# EAGLE board DX HRII2 (EAGLE 7.6.0)
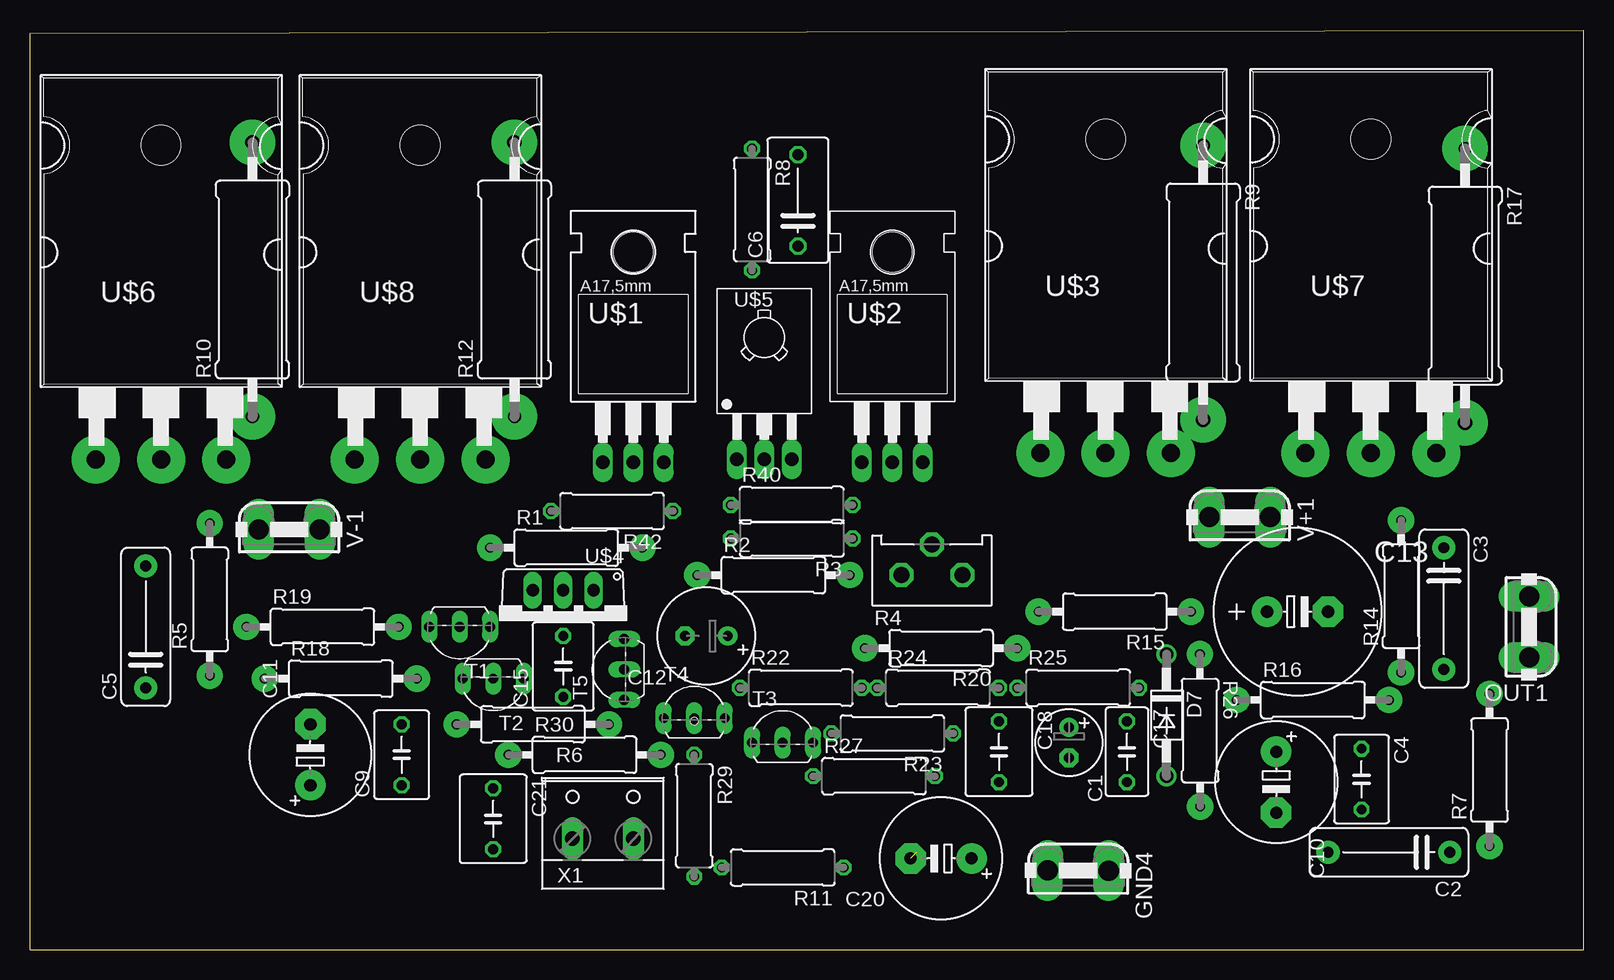
[diagram p0: board, top side]
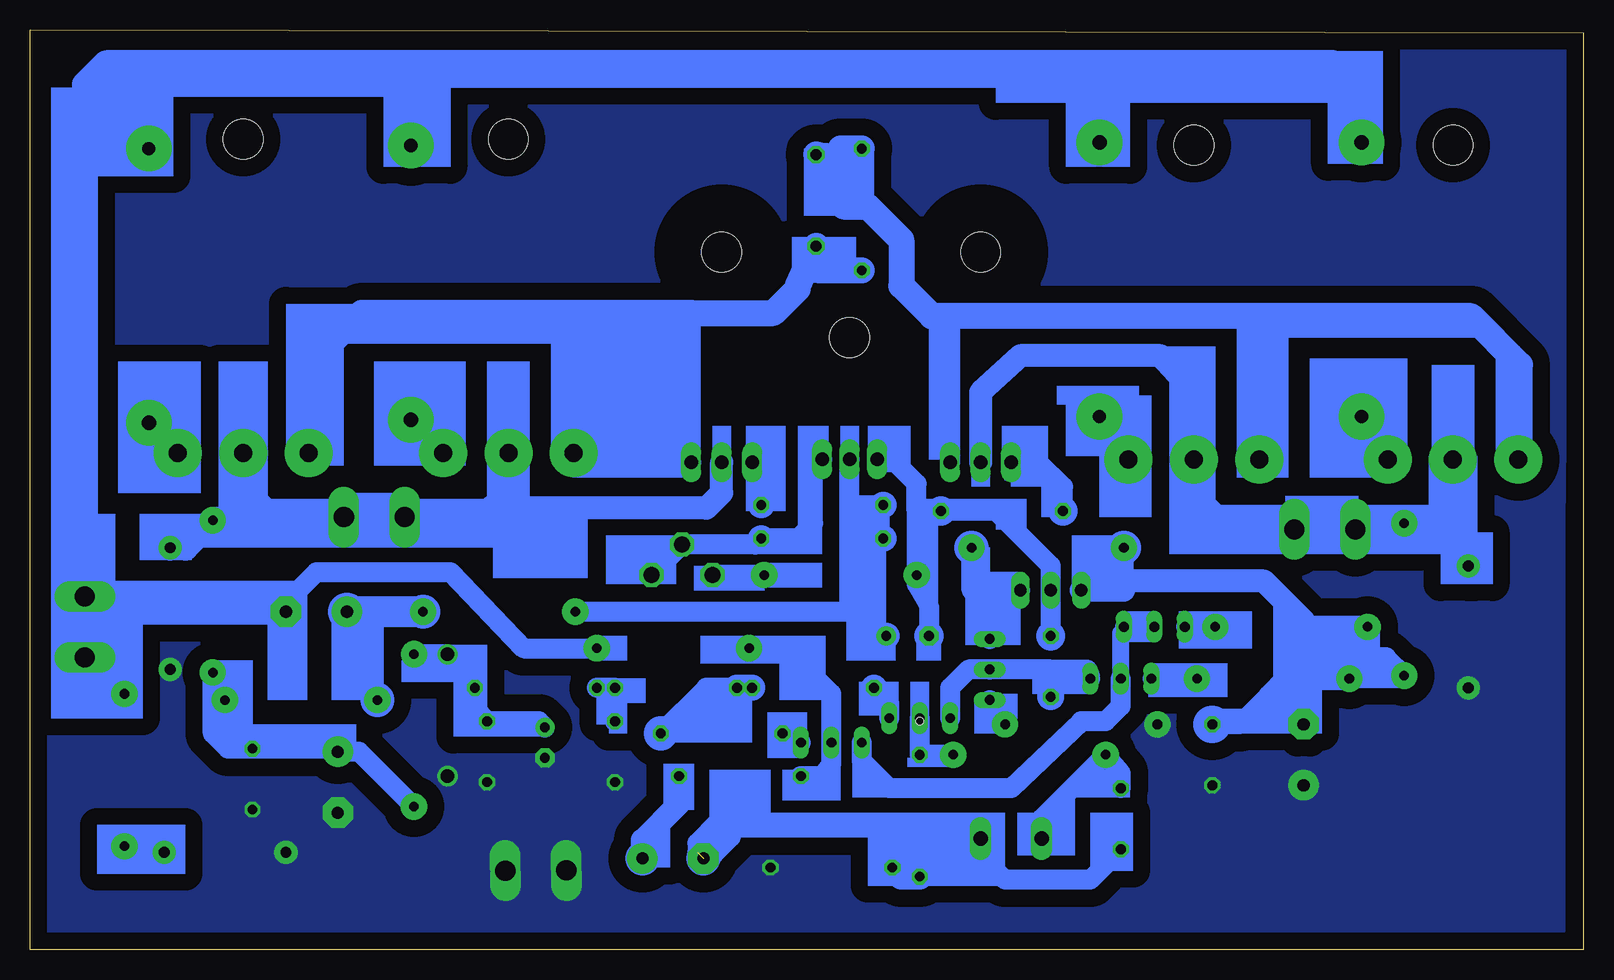
[diagram p1: board, bottom side, seen from below]

Size 129.54 x 76.71 mm. Coordinates in mm from the lower left corner, seen from the top.
Outline: 0,0 0,76.45 129.54,76.71 129.54,0 0,0
Copper layers (1*16): Top 0.035mm / dielectric 1.5mm / Bottom 0.035mm
Design rules "default *": minimum track width 10mil, minimum drill 30mil, track to track 8mil, track to pad 8mil, pad to pad 8mil, via to via 8mil, smd to smd 8mil, copper to edge 40mil, drill to drill 8mil, minimum pad ring 10mil, minimum via ring 8mil, stop-mask expansion 4mil, vias tented up to drill 0mil, thermal gap 10mil
Holes 0.6 mm at 55.37,19.07

## Footprints (pad centres in the part's own frame; a part is rotated, then mirrored left to right if it is on the bottom)
E2,5-6 = drill 0.813 pad 1.6: + -1.27,0 | drill 0.813 pad 1.6 octagon: - 1.27,0
C102-043X133 = drill 0.9 pad 1.93: 1 -5.08,0; 2 5.08,0
C050-045X075 = drill 0.813 octagon: 1 -2.54,0; 2 2.54,0
C075-052X106 = drill 0.914 octagon: 1 -3.81,0; 2 3.81,0
E5-10,5 = drill 1.016 pad 2.54: + -2.54,0 | drill 1.016 pad 2.54 octagon: - 2.54,0
E3,5-8 = drill 0.813 pad 1.6: + -1.778,0 | drill 0.813 pad 1.6 octagon: - 1.778,0
E5-13 = drill 1.016 pad 2.54: + -2.54,0 | drill 1.016 pad 2.54 octagon: - 2.54,0
C050-050X075 = drill 0.813 octagon: 1 -2.54,0; 2 2.54,0
C050-035X075 = drill 0.813 octagon: 1 -2.54,0; 2 2.54,0
C050-055X075 = drill 0.813 octagon: 1 -2.54,0; 2 2.54,0
DO41-10 = drill 1.118: A 5.08,0; C -5.08,0
FASTON = drill 1.676 pad 2.54 long: 1 -2.54,0; 2 2.54,0
0309/12 = drill 0.8 pad 2.184: 1 -6.35,0; 2 6.35,0
0309/10 = drill 0.813 octagon: 1 -5.08,0; 2 5.08,0
ECP10P = drill 1.321 octagon: A -2.54,0; E 2.54,0; S 0,2.54
0617/22 = drill 1.1 pad 3.81: 1 -11.43,0 | drill 1.2 pad 3.81: 2 11.43,0
TO92-CBE = drill 0.813 long: B 0,0; C -2.54,0; E 2.54,0
TO220 = drill 1.118 long: 1 -2.54,-6.35; 2 0,-6.35; 3 2.54,-6.35 | hole 3.302: 0,11.176
TO-264 = drill 1.5 pad 4: B -5.45,-6.096; E 5.45,-6.096 | drill 1.499 pad 4: C 0,-6.096 | hole 3.3: 0,20.09
TO220AV = drill 1.016 long: B -2.54,-2.54; C 0,-2.54; E 2.54,-2.54
TO126 = drill 1.118 long: 1 -2.286,-5.08; 2 0,-5.08; 3 2.286,-5.08 | hole 3.302: 0,5.08
W237-132 = drill 1.194 long: 1 -2.54,-0.635; 2 2.54,-0.635

## Placement (x,y rotation side)
C1  22uF  [E2,5-6]  86.61,17.29 270 top
C2  100nF  [C102-043X133]  113.28,8.15 180 top
C3  68nF  [C102-043X133]  117.86,28.47 270 top
C4  68nF  [C050-045X075]  111,14.24 270 top
C5  68nF  [C102-043X133]  9.65,26.94 90 top
C6  220nF  [C075-052X106]  64.01,62.5 90 top
C9  68nF  [C050-045X075]  30.99,16.28 90 top
C10  100uF  [E5-10,5]  103.89,13.99 270 top
C11  100uF  [E5-10,5]  23.37,16.28 90 top
C12  1u  [E3,5-8]  56.39,26.18 180 top
C13  100uF  [E5-13]  105.66,28.21 0 top
C15  150pF  [C050-050X075]  44.45,23.64 90 top
C17  68nF  [C050-035X075]  91.44,16.53 270 top
C18  10nF  [C050-055X075]  80.77,16.53 270 top
C20  220uF  [E5-10,5]  75.95,7.64 180 top
C21  220pF  [C050-055X075]  38.61,10.94 270 top
D7  12V  [DO41-10]  94.74,19.58 270 top
GND4  GND  [FASTON]  87.38,6.62 179.8 top
OUT1  QFIT  [FASTON]  124.97,26.94 90 top
R1  1K2  [0309/12]  44.7,33.55 0 top
R2  470R  [0309/12]  61.98,31.26 0 top
R3  2K2  [0309/10]  63.5,34.31 180 top
R4  1K  [ECP10P]  75.18,31.26 0 top
R5  47R  [0309/12]  14.99,29.23 90 top
R6  0R  [0309/12]  41.91,18.82 180 top
R7  10R  [0309/12]  121.67,15.01 90 top
R8  180R  [0309/10]  60.2,61.74 270 top
R9  .33  [0617/22]  97.79,55.65 270 top
R10  .33  [0617/22]  18.54,55.9 90 top
R11  5R6  [0309/10]  62.74,6.88 180 top
R12  .33  [0617/22]  40.39,55.9 90 top
R14  47R  [0309/12]  114.3,29.48 90 top
R15  3K3  [0309/12]  90.42,28.21 180 top
R16  2K2  [0309/12]  106.93,20.85 0 top
R17  .33  [0617/22]  119.63,55.39 270 top
R18  47R  [0309/12]  25.91,22.63 0 top
R19  47R  [0309/12]  24.38,26.94 0 top
R20  12K  [0309/12]  75.95,25.17 180 top
R22  100R  [0309/10]  64.26,21.86 0 top
R23  100R  [0309/10]  71.88,18.05 180 top
R24  3K6  [0309/10]  75.69,21.86 0 top
R25  4K7  [0309/10]  87.38,21.86 0 top
R26  1K8  [0309/12]  97.54,18.31 270.1 top
R27  680R  [0309/10]  70.36,14.5 0 top
R29  12K  [0309/10]  55.37,11.2 270 top
R30  150R  [0309/12]  46.23,16.28 0 top
R40  100R  [0309/10]  63.5,37.1 0 top
R42  100R  [0309/10]  48.51,36.6 180 top
T1  BC546A  [TO92-CBE]  35.81,26.94 180 top
T2  BC546A  [TO92-CBE]  38.61,22.63 180 top
T3  BC556A  [TO92-CBE]  62.74,17.29 0 top
T4  BC556A  [TO92-CBE]  55.37,19.32 0 top
T5  BC546A  [TO92-CBE]  49.53,23.39 90 top
U$1  A1220  [TO220]  50.29,47.01 0 top
U$2  C2690  [TO220]  71.88,47.01 0 top
U$3  C5200  [TO-264]  89.66,47.52 0 top
U$4  C2690A  [TO220AV]  44.45,27.45 180 top
U$5  BD139  [TO126]  61.21,45.99 0 top
U$6  A1943  [TO-264]  10.92,47.01 0 top
U$7  C5200  [TO-264]  111.76,47.52 0 top
U$8  A1943  [TO-264]  32.51,47.01 0 top
V+1  QFIT  [FASTON]  100.84,36.09 180 top
V-1  QFIT  [FASTON]  21.59,35.07 180 top
X1  [W237-132]  47.75,9.93 0 top

## Library data of the parts
C1-C6 C9-C13 C15 C17 C18 C20 C21 R1-R3 R5-R12 R14-R20 R22-R27 R29 R30 R40 R42 = resistor
D7 = diode
GND4 OUT1 V+1 V-1 = keystone
R4 = pot
T1-T5 = transistor-neu-to92
U$1 = transistor-pnp
U$2 U$5 = transistor-npn
U$3 U$6-U$8 = Rudi_TO264
U$4 = transistor-power
X1 = con-wago-508

## Nets
AGND: C20.- C21.2 R11.2 R29.2 X1.2
N$1: R1.2 T5.E U$4.B
N$2: R3.1 R4.E R4.S U$5.3
N$3: R6.1 T5.C
N$4: C12.+ R3.2 R15.2 R40.1 U$5.2
N$5: R40.2 U$2.1
N$6: C3.1 R14.2 U$2.2 U$3.C U$7.C V+1.1 V+1.2
N$7: R2.2 R4.A
N$8: C12.- C15.2 R2.1 R42.1 U$4.C U$5.1
N$9: R42.2 U$1.1
N$10: R9.2 U$3.E
N$11: C2.1 R7.1
N$12: R10.1 U$6.E
N$15: R17.2 U$7.E
N$16: C5.2 R5.2 U$1.2 U$6.C U$8.C V-1.1 V-1.2
N$17: C6.1 R8.2 U$2.3 U$3.B U$7.B
N$18: R12.1 U$8.E
N$20: C6.2 R8.1 U$1.3 U$6.B U$8.B
N$21: C9.2 C11.- R1.1 R5.1 R18.1 R19.1 U$4.E
N$25: C4.1 C10.+ R14.1 R16.2 R26.2
N$28: R29.1 R30.2 T4.B
N$30: C21.1 R30.1 X1.1
N$31: C13.+ R15.1 R16.1
N$34: R20.2 R27.1 T3.B
N$35: R18.2 T2.E
N$36: T1.B T1.C T2.B T3.C
N$37: R22.1 T4.E
N$38: C15.1 T2.C T4.C T5.B
N$39: R19.2 T1.E
N$40: R23.2 T3.E
N$41: R22.2 R23.1 R24.1
N$42: C18.1 R24.2 R25.1
N$43: C1.+ C17.1 D7.C R25.2 R26.1
N$46: C20.+ R27.2
PE: C1.- C2.2 C3.2 C4.2 C5.1 C9.1 C10.- C11.+ C17.2 C18.2 D7.A GND4.1 GND4.2 R6.2 R11.1
VCCIO: C13.- OUT1.1 OUT1.2 R7.2 R9.1 R10.2 R12.2 R17.1 R20.1

## Tracks (layer width: path | path; a pad name or v marks a point on that pad's centre or on a via)
AGND  (1 unrouted)
  Bottom 1.676: 50.8,10.18 55.37,10.18 | 55.37,10.18 71.12,10.18 71.63,10.69 72.14,10.69 73.91,8.91 73.91,8.15 | 55.37,10.18 R29.2 | C21.2 41.15,5.86 48.26,5.86 50.29,7.89 X1.2
  Bottom 1.93: X1.2 50.29,8.4
  Bottom 2.184: 50.8,10.18 50.29,9.67 X1.2 | R29.2 56.9,6.12 R11.2
N$1
  Bottom 1.676: R1.2 51.05,29.99 49.53,29.99 | 49.53,29.99 U$4.B | T5.E 49.53,29.99
N$2
  Bottom 1.676: U$5.3 64.26,40.15 64.26,35.58 65.53,34.31 R3.1 69.09,33.8 R4.S R4.E
N$3
  Bottom 1.676: R6.1 49.53,20.09 T5.C
N$4
  Bottom 1.676: 61.21,37.1 U$5.2 | 61.21,37.1 R40.1 | 61.21,34.31 R3.2 | 61.21,34.31 61.21,37.1 | 61.21,28.21 61.21,34.31 | C12.+ 59.18,26.18 61.21,28.21 | R15.2 61.21,28.21
N$5
  Bottom 1.676: U$2.1 68.58,39.9 R40.2
N$6
  Bottom 1.93: U$2.2 71.88,38.12 73.15,36.85 88.39,36.85 89.66,38.12
  Bottom 2.184: U$3.C 89.66,38.12 91.95,35.83 V+1.2 V+1.1 109.22,35.83 | 109.22,35.83 111.76,38.37 U$7.C | 109.22,35.83 R14.2 116.59,33.55 C3.1
N$7
  Bottom 1.676: R2.2 R4.A
N$8
  Bottom 1.676: U$5.1 58.67,40.66 57.4,40.66 55.63,38.88 55.63,36.6 | 55.63,36.6 R2.1 55.63,30.5 54.61,28.72 C12.- | 55.63,36.6 R42.1 49.02,36.6 44.45,32.02 U$4.C C15.2
N$9
  Bottom 1.676: U$1.1 45.47,40.66 43.43,38.63 R42.2
N$10
  Bottom 2.184: U$3.E 97.79,44.1 R9.2
N$11
  Bottom 1.676: C2.1 118.87,8.66 R7.1
N$12
  Bottom 2.184: U$6.E 18.54,43.08 R10.1
N$13
  Bottom 1.676: 71.12,9.93 71.12,9.42 72.64,7.89
N$15
  Bottom 2.184: U$7.E 119.63,43.85 R17.2
N$16
  Bottom 1.93: U$1.2 50.29,46.5 46.99,49.55 35.31,49.55 32.51,46.5 U$8.C
  Bottom 2.184: C5.2 9.4,32.28 12.7,35.58 | U$6.C 10.92,37.1 12.45,35.58 12.7,35.58 | 12.7,35.58 R5.2 V-1.2 V-1.1 30.23,35.58 32.51,37.87 U$8.C
N$17
  Bottom 1.676: U$2.3 74.42,53.11
  Bottom 2.184: 84.07,53.11 74.42,53.11 67.56,53.11 65.53,55.14 65.53,55.39 C6.1 63.75,56.66 R8.2 | 84.07,53.11 84.07,41.56 | 106.17,41.56 106.43,41.81 106.43,48.79 101.85,53.11 84.07,53.11
  Bottom 2.54: 106.17,41.56 U$7.B | 84.07,41.56 U$3.B
N$18
  Bottom 2.184: U$8.E 40.39,43.34 R12.1
N$20
  Bottom 1.676: 52.83,52.85 U$1.3 | 26.67,41.31 U$8.B
  Bottom 2.184: U$6.B 5.33,41.05 5.33,48.79 9.4,52.85 26.92,52.85 | 26.92,52.85 52.83,52.85 54.36,52.85 56.9,55.39 56.9,59.2 59.69,62 61.72,62 61.98,62.25 61.98,66.82 R8.1 61.21,66.06 C6.2 | 26.67,41.31 26.92,41.56 26.92,52.85
N$21
  Bottom 1.676: 38.35,30.75 R1.1 | R5.1 16.51,24.4 23.11,24.4 23.11,23.64 23.37,23.39 | 23.37,22.63 23.62,22.63 | 23.62,22.63 24.89,22.63 26.29,21.23 | 26.29,21.23 28.7,18.82 C9.2 | C11.- 23.88,18.82 26.29,21.23 | 23.62,22.63 23.37,22.88 23.37,23.39 | 23.37,23.39 23.37,26.94
  Bottom 1.93: U$4.E 38.35,29.99 38.35,30.75 26.67,30.75 23.37,27.45 23.37,26.94 R19.1 | 23.37,22.63 R18.1
N$25
  Bottom 1.676: R26.2 102.12,16.53 C10.+ 104.14,16.78 C4.1 113.03,16.78 114.3,18.05 114.3,20.59 | 114.3,20.59 R14.1 | R16.2 113.54,20.59 114.3,20.59
N$28
  Bottom 1.676: R30.2 R29.1 T4.B
N$30
  Bottom 1.676: C21.1 38.61,14.75 R30.1 45.21,10.94 X1.1
N$31
  Bottom 1.676: R15.1 C13.+ 103.12,23.39 R16.1
N$34
  Bottom 1.676: R27.1 63.5,14.5 62.74,15.51 T3.B 62.74,21.36 66.55,25.17 R20.2
N$35
  Bottom 1.422: R18.2 T2.E
N$36
  Bottom 1.422: T1.B T1.C 38.1,26.94 38.61,26.44 T2.B
  Bottom 1.676: T3.C 60.2,15.77 57.91,13.48 47.75,13.48 41.91,19.07 39.88,19.07 38.61,20.34 T2.B
N$37
  Bottom 1.676: R22.1 57.91,20.59 T4.E
N$38
  Bottom 1.676: T4.C 52.83,21.86 51.31,23.39 T5.B 44.45,23.39 | T2.C 41.4,23.39 44.45,23.39 | C15.1 44.45,23.39
N$39
  Bottom 1.422: R19.2 T1.E
N$40
  Bottom 1.676: T3.E 66.04,17.29 R23.2
N$41
  Bottom 1.676: R23.1 73.15,21.86 R24.1
  Bottom 2.184: R22.2 R24.1
N$42
  Bottom 1.676: C18.1 R24.2 R25.1
N$43
  Bottom 1.676: C1.+ 87.12,19.07 C17.1 92.46,20.09 R25.2 94.74,24.15 D7.C | D7.C | D7.C R26.1
N$46
  Bottom 1.93: R27.2 75.44,12.21 78.49,9.16 C20.+
PE
  pour Bottom (isolate 1.422, no thermals): 1.78,35.58 1.78,1.54 128.02,1.54 127.51,76.47 1.27,76.47
VCCIO
  Bottom 1.676: R20.1 88.39,25.17 94.49,31.52 105.66,31.52 108.2,28.98 C13.-
  Bottom 2.184: R10.2 18.54,71.65 20.83,73.93 40.39,73.93 | 40.39,73.93 97.79,73.93 | 97.79,73.93 123.19,73.93 124.97,72.16 124.97,66.82 | 124.97,66.82 124.97,31.77 122.68,29.48 OUT1.2 122.43,28.21 | 122.43,28.21 OUT1.1 122.43,22.12 R7.2 | 108.2,28.98 108.97,28.21 122.43,28.21 | 124.97,66.82 R17.1 | 97.79,73.93 R9.1 | 40.39,73.93 R12.2
(copper drawn outside any net)
  shapes: Bottom area x219, Bottom circle x22